# Altium PCB IGrippioV2Pcb.PcbDoc (part 2 of 2)
Units mil, origin at the board's own origin, x right, y up, seen from the top; angles counter-clockwise.
Board outline 2173.3 x 4360 mil, 2 copper layers (Top Layer, Bottom Layer); 134 components, 148 nets, 592 pads, 249 vias.
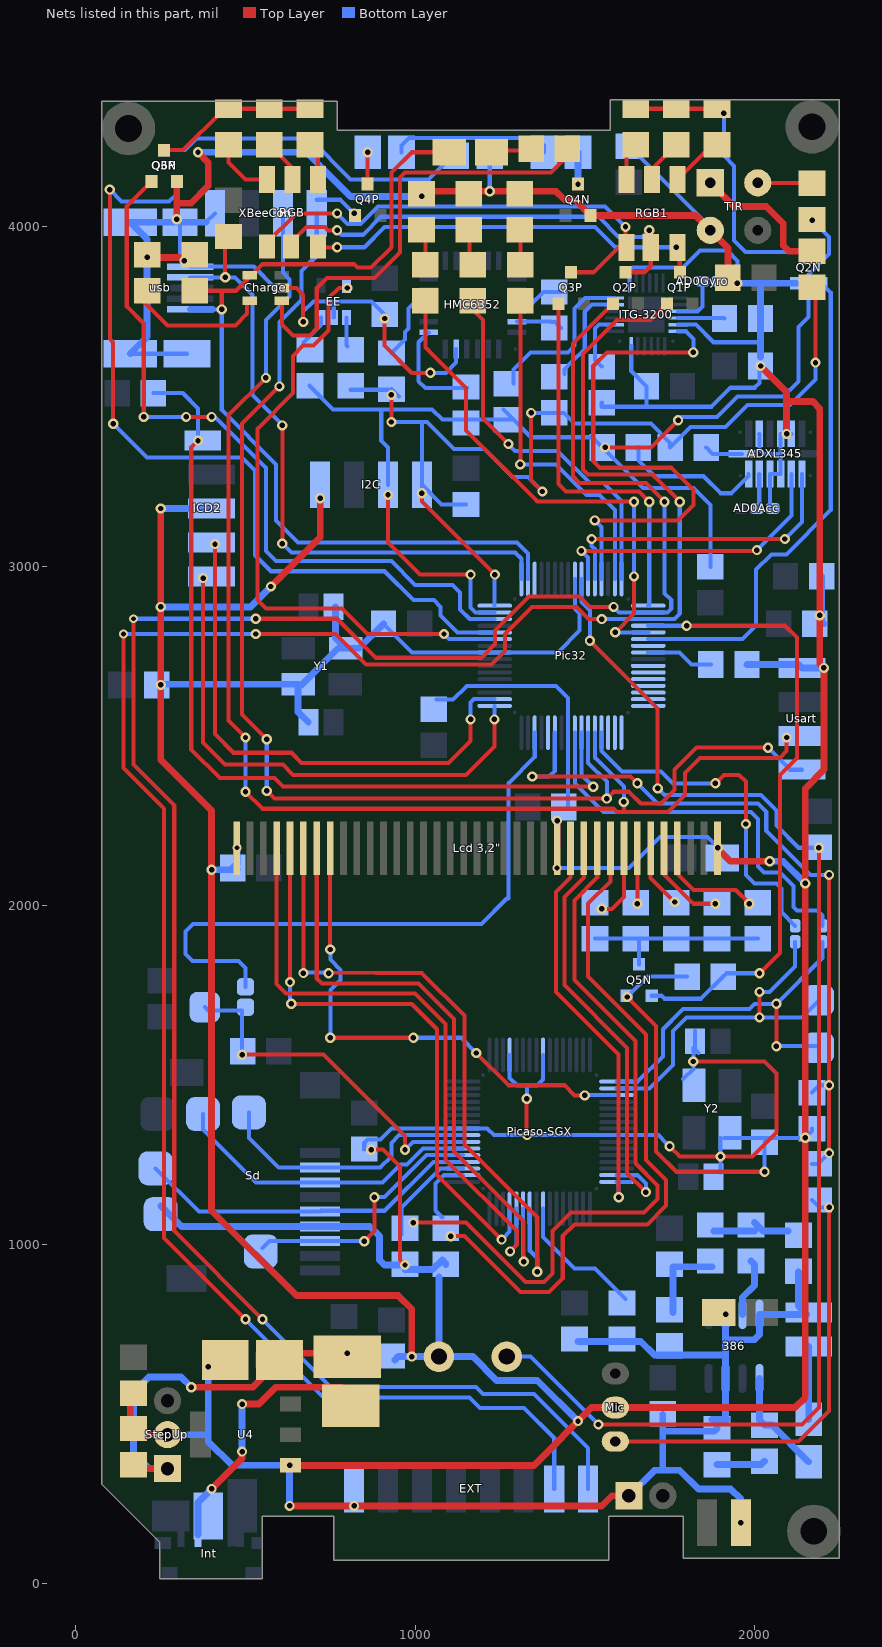
[diagram p2: the nets of this part, all layers, seen from the top]

## Via types
v1: diameter 30, hole 16, Top Layer to Bottom Layer, 239 vias
v2: diameter 26, hole 14, Top Layer to Bottom Layer, 6 vias
v3: diameter 27, hole 14, Top Layer to Bottom Layer, 3 vias
v4: diameter 28, hole 16, Top Layer to Bottom Layer, 1 vias

## Nets (pads, with @x,y where several pads share a name; then routed paths per layer and width w, separated by ;. In a path a pad name is that pad's centre, name@x,y a point inside that pad or via, vN(x,y) a via of type N, cw(c..) or ccw(c..) an arc to the next point about the centre after c; other vN are vias at no path point) (continued)
DGND: 386.2 386.4 386.7 "Lcd 3,2\".1" "Lcd 3,2\".25" "Lcd 3,2\".37" "led 1.2" "led 2.2" "led 3.2" "VIN EXT.1" AD0Acc.3 AD0Gyro.3 ADXL345.2 ADXL345.4 ADXL345.5 ADXL345.10 ADXL345.11 B1.2 B2.2 B3.2 B4.2 B5.2 B6.2 B7.2 B8.2 B9.2 B11.2 B12.2 B13.2 B14.2 BC.2 BU.2 By386.2 ByAcc2.2 ByAcc.2 C1.2 C2.2 C3.1 C4.1 C5.2 C6.2 C7.2 C9.2 C12.2 C13.1 C14.2 C16.2 C17.2 C18.2 Carica.1 Charge.2 EE.2 EXT.1 HMC6352.5 I2C.1 ICD2.3 ITG-3200.1 ITG-3200.11 ITG-3200.18 LS1.2 Mic.2 pad.0@250,1090 Pic32.9 Pic32.20 Pic32.25 Pic32.41 Picaso-SGX.9 Picaso-SGX.20 Picaso-SGX.25 Picaso-SGX.41 Q2N.2 Q3N.2 Q4N.2 Q5N.2 R4.2 R7.1 R8.2 R15.2 R16.2 R20.2 R29.2 Sd.6 SOK.2 StepUp.2 TIR.4 U4.1 Usart.4 usb.1 usb.G1 usb.G2 usb.G3 usb.G4 UV.1 Vin.1 XBeeCon.4 Y1.0 Y2.0 | length 30087.9
  Top Layer w12: Charge.2@607.24,3820 650,3820 670,3800 v1(670,3720) ; v1(870,1280) 905,1280 955,1230 955,955 v1(970,940) ; v1(910,3730) 910,3650 990,3570 v1(1045,3570) ; v1(1328.86,1430) 1328.86,1323.98 v1(1330,1322.83) ; v1@1630,1730 v1(1625,1730) 1710,1645 1710,1275 1770,1215 v1(2030,1215) ; v1(1750,1290) 1780,1260 v1(1900,1260) 1995,1260 2065,1330 2065,1505 2030,1540 v1(1820,1540)
  Top Layer w20: C6.2@150,440 StepUp.2@270,440 ; C6.2@160,480 C7.2@160,570 ; R29.2@220,3910 BU.2@348.11,3910 ; v1(250,3170) v1(250,2880) v1(250,2650) 250,2430 400,2280 v1(400,2105) 400,1100 650,850 950,850 990,810 v1(990,670) ; v1(297.4,4022.6) 297.4,4070 ; Q3N.2@297.4,4133.74 297.4,4070 ; v1(360,4220) 390,4190 390,4120 340,4070 297.4,4070 ; v1(575,2940) 720,3085 v1(720,3200) ; v1(630,230) v1(820,230) 1550,230 1580,260 Vin.1@1630,260 ; U4.1@632.87,349.45 959.45,349.45 ; 960,350 959.45,349.45 ; 1020,4105 1415,4105 1440,4080 1471.14,4080 Q4N.2@1517.4,4033.74 1826.26,4033.74 TIR.4@1870,3990 1921.89,3938.11 B11.2@1921.89,3850 ; 1418.58,2168.5 v1(1418.58,2250) ; v1(1892.52,2170) 1891.02,2168.5 1929.53,2130 v1(2045,2130) ; v1(2018.11,3590) 2095,3513.11 2095,3485 ; v1(2095,3390) 2095,3485 ; 959.45,349.45 1350,349.45 1520,519.45 1520,520 Mic.2@1590,520 2120,520 2150,550 v1(2150,1315) v1(2150,2065) 2150,2345 2205,2400 v1(2205,2700) 2192.5,2712.5 v1(2192.5,2855) 2192.5,3465 2172.5,3485 2095,3485
  Bottom Layer w12: usb.G3@160,3626.1 usb.G4@327.32,3626.1 ; usb.G2@307.09,4013.9 307.09,3913.07 usb.1@337.17,3882.99 524.25,3882.99 587.24,3820 v4@607.24,3820 ; XBeeCon.4@383.9,4013.9 XBeeCon.4@410,4040 ; v1(670,3720) 670,3750 700,3780 760,3780 ; EE.2@760,3732.76 760,3780 ; B6.2@850,1280 850,1300 860,1310 897.48,1310 930,1342.52 Picaso-SGX.9@1140.94,1342.52 1212.48,1342.52 1232.17,1322.83 v1(1330,1322.83) Picaso-SGX.41@1593.7,1322.83 1717.17,1322.83 v1@1740,1300 ; B5.2@906.89,2830 991.27,2745.62 Pic32.25@1234.4,2745.62 1420.62,2745.62 1485,2810 1485,2860 1470.62,2874.38 Pic32.41@1470.62,2962.15 ; B13.2@910,3741.89 871.89,3780 760,3780 ; v1(1045,3570) 1090.71,3570 1120.71,3600 HMC6352.5@1120.71,3640 ; B8.2@1063.45,2606.56 1111.56,2606.56 1152.19,2647.19 Pic32.20@1234.4,2647.19 1414.71,2647.19 1450.93,2610.97 Pic32.9@1450.93,2509.4 B4.2@1450.93,2284.07 ; v1@1220,4100 UV.1@1220,4210 UV.1@1220,4220 ; Picaso-SGX.20@1278.74,1559.06 1278.74,1491.26 1300,1470 1330,1470 ; v1@1330,1430 1330,1470 ; Picaso-SGX.25@1377.17,1559.06 1377.17,1487.17 1360,1470 1330,1470 ; v3(1418,2110) 1630,2110 1721.26,2201.26 1861.26,2201.26 v1(1892.52,2170) ; C18.2@1550,3481.89 1550,3470 1681.89,3470 ; Q5N.2@1622.6,1733.74 Q5N.2@1623.74,1733.74 ; v1(1625,1730) 1685,1790 R8.2@1801.89,1790 ; R20.2@1630,4238.11 1870,3998.11 TIR.4@1870,3990 ; ITG-3200.1@1632.05,3834.76 1632.05,3872.05 1640,3880 1790,3880 1840,3930 1920,3930 1950,3900 v1(1950,3833.74) ; ITG-3200.18@1636.97,3648.58 1636.97,3574.92 B12.2@1681.89,3530 1681.89,3470 ; ITG-3200.11@1774.76,3711.73 1828.27,3711.73 1880,3660 2018.11,3660 ; Y2.0@1789.76,1488.19 1820,1518.43 v1(1820,1540) 1820,1580 C12.2@1835,1565 ; C12.2@1825,1570 C12.2@1825,1630 ; C13.1@1900,1212.13 v1(1900,1260) Y2.0@1900,1314.96 ; Y2.0@1912.13,1314.96 2019.96,1314.96 2020,1315 v1(2150,1315) 2170,1335 C16.2@2170,1341.89 ; ADXL345.2@2014.33,3390 2015.52,3388.81 2015.52,3344.48 2030,3330 2077.32,3330 ; v1(2018.11,3590) 2015,3586.89 2015,3540 2000.94,3525.94 1954.06,3525.94 1930,3525.94 1874.06,3470 1681.89,3470 ; v1(2030,1215) B7.2@2030,1301.89 ; AD0Acc.3@2053.5,3170 2045.83,3177.68 ADXL345.11@2045.83,3271.89 ADXL345.10@2077.32,3271.89 2077.32,3330 ; ADXL345.5@2108.82,3390 ADXL345.4@2077.32,3390 2077.32,3330
  Bottom Layer w20: usb.G3@160,3626.1 210,3676.1 210,3963.9 usb.G1@160,4013.9 usb.G2@307.09,4013.9 XBeeCon.4@383.9,4013.9 ; pad.0@250,1115 311.14,1053.86 Sd.6@720,1053.86 866.14,1053.86 895,1025 895,955 910,940 v1(970,940) ; BC.2@250,2651.81 Y1.0@655,2651.81 Y1.0@655,2650 ; v1(250,2880) 515,2880 v1(575,2940) ; v1(250,3170) ICD2.3@400,3170 ; StepUp.2@270,440 390,440 ; v1(360,4220) 680,4220 810,4090 v1(1020,4090) ; v1(390,640) 390,420 460,350 v1(630,350) v1(630,230) ; v1(400,2105) B9.2@475,2105 ; B9.2@461.89,2110 475,2123.11 v3(475,2170) ; C3.1@685,2540 655,2570 Y1.0@655,2650 ; C4.1@765,2880 765,2788.11 Y1.0@795,2758.11 ; B5.2@906.89,2830 835,2758.11 Y1.0@795,2758.11 ; R7.1@940,660 950,670 v1(990,670) SOK.2@1070,670 ; R16.2@970,926.42 1051.42,926.42 1080,955 1090,945 R15.2@1090,941.89 ; R15.2@1070,905 SOK.2@1070,670 ; SOK.2@1090,690 SOK.2@1070,670 ; v1(1480,480) 1360,600 1240,600 1170,670 SOK.2@1070,670 ; B1.2@1480,715 1665,715 1705,675 1915,675 ; Mic.2@1590,520 B3.2@1710,520 ; Vin.1@1630,260 1705,335 1730,335 ; B3.2@1730,500 1730,450 ; R4.2@1875,485 1920,485 1915,490 386.7@1915,605.51 ; R4.2@1890,458.11 1881.89,450 1730,450 ; AD0Gyro.3@1893.7,3840 1899.96,3833.74 v1(1950,3833.74) 2018.11,3833.74 ; 386.7@1915,645 386.7@1915,605.51 ; v1(1915,794.49) 1915,720 ; v1(1960,180) 1960,250 1930,280 1835,280 1780,335 1730,335 ; C9.2@1978.11,2710 2130,2710 Usart.4@2140,2700 v1(2205,2700) ; B2.2@2018.11,3616.89 2018.11,3660 C17.2@2018.11,3730 2018.11,3833.74 ; v1(2045,2130) 2085,2130 v1(2150,2065) ; Q2N.2@2122.6,3833.74 2018.11,3833.74 ; C5.2@2130,920 2130,818.98 2154.49,794.49 386.4@2015,794.49 2015,735 2000,720 1915,720 ; ByAcc2.2@2198.11,2970 2198.11,2836.89 ByAcc.2@2205,2830 ; Y1.0@655,2650 665,2650 773.11,2758.11 Y1.0@795,2758.11 ; 1730,335 1730,450 ; 386.7@1915,605.51 1915,675 ; 1915,675 1915,720
  other v1: 320,3900 210,3910 1220,4105
  other v4: 600,3820
I2CCLOCK: I2C.4 Pic32.32 R6.2 R35.2 S2.1 S3.1 S6.2 S7.1 | length 3028.2
  Top Layer w12: v1(930,3425) v1(930,3505) ; v1(1020,3215) 1020,3190 v1(1235,2975) ; v1(1341.81,3451.81) 1341.81,3253.19 v1(1375,3220) ; R35.2@2170,3821.89 2180,3811.89 v1(2180,3600)
  Bottom Layer w12: S7.1@809.92,3520 S6.2@920,3520 ; v1(930,3425) 1020,3425 ; S6.2@930,3521.89 S6.2@951.89,3500 ; v1(1020,3215) I2C.4@1020,3240 ; R6.2@1150,3181.89 1078.11,3181.89 I2C.4@1020,3240 ; Pic32.32@1234.4,2883.41 v1@1234.4,2975 ; v1(1341.81,3451.81) S2.1@1410,3451.81 1438.19,3451.81 1470,3420 1695,3420 1751.81,3363.19 S3.1@1751.81,3350 1811.81,3410 1915,3410 1980,3475 2105,3475 2180,3550 v1(2180,3600) ; v1(1375,3220) 1332.5,3262.5 1287.5,3262.5 1205,3345 1115,3345 1035,3425 1020,3425 ; I2C.4@1020,3240 1020,3425
I2CDATA: I2C.3 Pic32.31 R5.2 R18.2 S1.1 S4.1 S5.2 S8.1 | length 3562.8
  Top Layer w12: v1(920,3210) 920,3070 1015,2975 v1(1163.45,2975) ; v1(1560,3350) 1695,3350 v1(1775,3430)
  Bottom Layer w12: S8.1@688.19,3531.81 758.11,3461.89 900,3461.89 ; I2C.3@920,3240 920,3350 900,3370 900,3461.89 ; v1(1163.45,2975) 1163.45,2878.45 1178.18,2863.73 Pic32.31@1234.4,2863.73 ; S1.1@1259.92,3461.89 S1.1@1290,3431.81 ; v1(1775,3430) 1785,3440 1888.81,3440 1889.4,3439.4 1950,3500 2085,3500 2130,3545 2130,3705 2159.72,3734.72 2159.72,3859.72 2220,3920 2220,3970 v1(2170,4020) ; R5.2@1870,2998.11 1870,3180 1820,3230 1671.81,3230 S4.1@1551.81,3350 1521.81,3380 1341.81,3380 S1.1@1290,3431.81 ; 900,3461.89 1050,3461.89 1080.08,3431.81 S1.1@1270,3431.81 S1.1@1290,3431.81
INTACC1: ADXL345.8 Pic32.44 | length 909.6
  Top Layer w12: v1(1520,3080) v1(2090,3080)
  Bottom Layer w12: v1(1520,3080) 1520,3060 1529.67,3050.33 Pic32.44@1529.67,2962.15 ; v1@2095,3080 v1(2090,3080) 2140.31,3130.32 ADXL345.8@2140.31,3271.89
INTACC2: ADXL345.9 Pic32.43 | length 882.1
  Top Layer w12: v1(1490,3045) v1@2007.5,3045
  Bottom Layer w12: v1@1485,3050 v1(1490,3045) 1509.99,3025.01 Pic32.43@1509.99,2962.15 ; v1(2007.5,3047.5) 2055,3095 2108.82,3148.82 ADXL345.9@2108.82,3271.89
INTGYRO: ITG-3200.12 Pic32.45 | length 1555.9
  Top Layer w12: v1(1529.36,3135) 1775,3135 1820,3180 1820,3225 1755,3290 1545,3290 1525,3310 1525,3590 1565,3630 v1(1820,3630)
  Bottom Layer w12: v1@1525,3135 v1(1529.36,3135) 1549.36,3115 Pic32.45@1549.36,2962.15 ; ITG-3200.12@1774.76,3692.05 1797.95,3692.05 1820,3670 v1(1820,3630)
K1: "Lcd 3,2\".30" R90.1 | length 301.3
  Top Layer w12: v1(1550,1990) 1580,1990 1615.43,2025.43 1615.43,2168.5 1615.43,2090.43
K2: "Lcd 3,2\".31" R91.1 | length 163.6
  Top Layer w12: 1654.8,2168.5 1654.8,2005.2 v1(1655,2005)
K3: "Lcd 3,2\".32" R92.1 | length 187.8
  Top Layer w12: 1694.17,2168.5 1694.17,2080.83 v1(1765,2010)
K4: "Lcd 3,2\".33" R93.1 | length 264.3
  Top Layer w12: 1733.54,2168.5 1733.54,2091.46 1815.84,2009.16 1820,2005 v1(1885,2005)
K5: "Lcd 3,2\".34" R94.1 | length 324.6
  Top Layer w12: 1772.91,2168.5 1772.91,2092.09 1820,2045 1945,2045 v1(1985,2005)
LCDCS: "Lcd 3,2\".4" Picaso-SGX.60 | length 1846.7
  Top Layer w12: 591.81,2168.5 591.81,1768.19 620,1740 1000,1740 1090,1650 1090,1250 1300,1040 1300,1000 v1(1280,980)
  Bottom Layer w12: v1(1280,980) 1298.43,998.43 Picaso-SGX.60@1298.43,1106.3
LCDRX: LcdRX.1 Pic32.8 | length 1189.2
  Bottom Layer w12: Pic32.8@1470.62,2509.4 1470.62,2359.38 1555,2275 1990,2275 2010,2255 2010,2115 2027.76,2097.24 2075,2097.24 2115,2057.24 2115,1995 2125,1985 2185,1985 2200,1970 LcdRX.1@2200,1940
LCDRX1: LcdRX.2 Picaso-SGX.33 Rx.1 | length 1094
  Top Layer w12: v1@2065,1595 v1(2065,1710)
  Bottom Layer w12: Picaso-SGX.33@1593.7,1480.31 1655.31,1480.31 1730,1555 1730,1635 1785,1690 1790,1695 1985,1695 2000,1710 v1(2065,1710) 2200,1845 LcdRX.2@2200,1892.76 ; v1(2065,1585) 2185,1585 Rx.1@2190,1580
LCDTX: LcdTX.1 Pic32.4 | length 1070.8
  Top Layer w12: v1@1875,2360 v1(1885,2360) 1910,2385 1955,2385 1975,2365 v1(1975,2240)
  Bottom Layer w12: Pic32.4@1549.36,2509.4 1549.36,2455.64 1610,2395 1725,2395 1760,2360 v1(1885,2360) ; v1(1975,2240) 1975,2090 2000,2065 2065,2065 2080,2050 2080,1980 LcdTX.1@2120,1940
LCDTX1: LcdTX.2 Picaso-SGX.34 Tx.1 | length 1046.1
  Top Layer w12: v1(2015,1670) v1(2015,1745)
  Bottom Layer w12: Picaso-SGX.34@1593.7,1460.63 1690.63,1460.63 1760,1530 1760,1630 1800,1670 v1(2015,1670) 2140,1670 Tx.1@2190,1720 ; v1(2015,1745) 2045,1745 2120,1820 LcdTX.2@2120,1892.76
LED1: Pic32.48 R11.2 | length 1098
  Top Layer w12: R11.2@1170,3781.89 1170,3755 1200,3725 1200,3435 v1(1275,3360)
  Bottom Layer w12: v1(1275,3360) 1295,3340 1420,3340 1515,3245 1555,3245 1608.41,3191.59 Pic32.48@1608.41,2962.15
LED2: Pic32.47 R9.2 | length 1019.4
  Top Layer w12: v1(1310,3300) R9.2@1310,3781.89
  Bottom Layer w12: v1(1310,3300) 1415,3300 1505,3210 1543.73,3210 1588.73,3165 Pic32.47@1588.73,2962.15
LED3: Pic32.53 R10.2 | length 1508.7
  Top Layer w12: R10.2@1030,3781.89 1030,3645 1150,3525 1150,3400 1360,3190 v1(1645,3190) ; v1(1590,2805) 1645,2860 v1(1645,2970)
  Bottom Layer w12: v1@1600,2805 1600.33,2804.67 Pic32.53@1687.15,2804.67 ; v1(1645,2970) v1(1645,3190)
LEDLCD: Pic32.52 Q5N.1 R8.1 | length 1851.5
  Top Layer w12: v1(1800,2824.36) 2090.64,2824.36 2125,2790 2125,2435 2075,2385 2075,1860 v1(2015,1800)
  Bottom Layer w12: Pic32.52@1687.15,2824.36 v1(1800,2824.36) ; Q5N.1@1697.4,1733.74 1726.26,1733.74 1735,1725 1843.19,1725 R8.1@1908.19,1790 ; R8.1@1900,1781.81 R8.1@1908.19,1790 ; v1(2015,1800) 1918.19,1800 R8.1@1908.19,1790
LEDUV: Pic32.28 Q6P.1 | length 2499.1
  Top Layer w12: v1(100,4110) 100,3670 110,3660 v1(110,3420)
  Bottom Layer w12: v1(100,4110) 135,4075 275,4075 297.4,4097.4 Q6P.1@297.4,4133.74 ; v1(110,3420) 210,3320 ; 205,3325 210,3320 ; Pic32.28@1234.4,2804.67 1125.33,2804.67 1075,2855 1075,2880 1055,2900 995,2900 910,2985 575,2985 527.82,3032.18 527.82,3282.18 490,3320 210,3320
MIC: C16.1 Pic32.11 R28.2 | length 2155.8
  Top Layer w12: v1(1345,2380) 1635,2380 v1(1655,2360) ; v1(2220,1270) v1(2220,1470) v1(2220,2090)
  Bottom Layer w12: v1(1345,2380) 1395,2380 1411.56,2396.56 1411.56,2435 Pic32.11@1411.56,2509.4 ; v1(1655,2360) 1715,2300 2010,2300 2035,2275 2035,2220 2165,2090 v1(2220,2090) ; R28.2@2170,1238.11 2188.11,1238.11 v1(2220,1270) ; C16.1@2170,1448.19 2191.81,1470 v1(2220,1470)
MRCL: ICD2.1 Pic32.7 R27.1 | length 2568.1
  Top Layer w12: v1(360,3370) 340,3350 340,2910 340,2460 425,2375 585,2375 610,2350 v1(1525,2350)
  Bottom Layer w12: R27.1@228.19,3510 315,3510 360,3465 v1(360,3370) ; Pic32.7@1490.3,2509.4 1490.3,2384.7 v1(1525,2350)
Net386_3: 386.3 C8.1 | length 176
  Bottom Layer w20: 386.3@1965,794.49 1965,845 2000,880 2000,941.81 C8.1@1990,951.81
Net386_5: 386.5 C10.1 C11.1 | length 318.3
  Bottom Layer w20: 386.5@2015,605.51 2015,483.19 C10.1@2030,468.19 2051.81,468.19 C11.1@2160,360
NetAD0Acc_2: AD0Acc.2 ADXL345.12 | length 104.8
  Bottom Layer w12: AD0Acc.2@2007.24,3170 2014.33,3177.09 ADXL345.12@2014.33,3271.89
NetAD0Gyro_2: AD0Gyro.2 ITG-3200.9 | length 160
  Bottom Layer w12: ITG-3200.9@1774.76,3751.1 1832.51,3751.1 1847.24,3765.83 1847.24,3810 ; 1847.24,3802.76 1847.24,3810 ; AD0Gyro.2@1847.24,3840 1847.24,3810
NetADXL345_13: ADXL345.13 S4.2 | length 434.6
  Bottom Layer w12: S4.2@1655,3346.89 S4.2@1658.11,3350 1658.11,3311.89 1705,3265 1850,3265 1900,3215 1932.16,3215 1982.83,3265.67 ADXL345.13@1982.83,3271.89
NetADXL345_14: ADXL345.14 S3.2 | length 144.3
  Bottom Layer w12: S3.2@1858.11,3350 1877.17,3330.94 ADXL345.14@1963.15,3330.94 ADXL345.14@1931.81,3330.94
NetC2_1: C2.1 R2.2 R3.1 | length 250
  Bottom Layer w20: C2.1@1760,800 1760,935 R3.1@1875,935
NetC5_1: C5.1 C8.2 R3.2 | length 230.4
  Bottom Layer w20: R3.2@1880,1040 C8.2@2000,1040 ; C8.2@2000,1065 2025,1040 C5.1@2100,1040
NetC9_1: C9.1 Pic32.56 | length 199.4
  Bottom Layer w12: Pic32.56@1687.15,2745.62 1779.38,2745.62 1815,2710 C9.1@1871.81,2710
NetC10_2: C10.2 R4.1 | length 144.2
  Bottom Layer w20: R4.1@1890,351.81 2019.92,351.81 C10.2@2030,361.89
NetC11_2: C11.2 LS1.1 | length 215
  Bottom Layer w20: C11.2@2160,485 LS1.1@2160,700
NetC14_1: C14.1 Picaso-SGX.56 | length 402
  Bottom Layer w12: Picaso-SGX.56@1377.17,1106.3 1377.17,1022.83 1470,930 1530,930 C14.1@1620,840
NetC17_1: C17.1 ITG-3200.10 | length 137.6
  Bottom Layer w12: ITG-3200.10@1774.76,3731.42 1910.39,3731.42 C17.1@1911.81,3730
NetC18_1: C18.1 ITG-3200.20 | length 182.7
  Bottom Layer w12: C18.1@1550,3588.19 1530,3608.19 1530,3700 1541.73,3711.73 ITG-3200.20@1587.76,3711.73
NetCharge_1: Charge.1 R31.1 | length 1364.1
  Top Layer w12: Charge.1@607.24,3782.6 607.24,3712.76 640,3680 690,3680 710,3700 710,3820 740,3850 880,3850 955,3925 955,4145 970,4160 1400,4160 1448.19,4208.19 R31.1@1448.19,4230
NetCharge_5: Charge.5 R29.1 | length 389.8
  Top Layer w12: R29.1@189.09,3790.91 270,3710 470,3710 504.1,3744.1 Charge.5@504.1,3771.26
NetEE_1: EE.1 S7.2 | length 86.6
  Bottom Layer w12: EE.1@797.4,3732.76 797.4,3649.84 S7.2@800,3647.24
NetEE_3: EE.3 S8.2 | length 95.1
  Bottom Layer w12: S8.2@670.94,3659.06 722.6,3710.71 EE.3@722.6,3732.76
NetHMC6352_7: HMC6352.7 S5.1 | length 318.6
  Bottom Layer w12: HMC6352.7@1029.21,3689.21 HMC6352.7@1039.21,3689.21 ; HMC6352.7@1040,3689.21 HMC6352.7@1039.21,3689.21 ; S5.1@1153.19,3525 1030,3525 1010,3545 1010,3660 HMC6352.7@1039.21,3689.21
NetHMC6352_10: HMC6352.10 S6.1 | length 222.3
  Bottom Layer w12: S6.1@930,3628.19 970,3668.19 970,3690 980,3700 980,3760 1003.7,3783.7 HMC6352.10@1040,3783.7
NetHMC6352_22: HMC6352.22 R1.1 | length 153.3
  Bottom Layer w12: HMC6352.22@1300,3752.2 1322.32,3752.2 1340.56,3770.44 1340.56,3770.56 1378.19,3808.19 R1.1@1430,3808.19
NetHMC6352_23: HMC6352.23 R1.2 | length 137.8
  Bottom Layer w12: HMC6352.23@1300,3720.71 1399.29,3720.71 1400,3720 1411.89,3720 R1.2@1430,3701.89
NetIR1_1: IR1.1 IR2.2 | length 478.4
  Bottom Layer w12: IR1.1@960,4220 960,4240 982.21,4262.21 1357.79,4262.21 1380,4240 IR2.2@1380,4220
NetIR1_2: IR1.2 Q4P.3 | length 93.7
  Top Layer w12: Q4P.3@860,4126.26 v1(860,4220)
NetIR2_1: IR2.1 Q4N.3 | length 93.7
  Bottom Layer w20: v1(1480,4126.26) IR2.1@1480,4220
NetITG-3200_23: ITG-3200.23 S2.2 | length 304
  Bottom Layer w12: S2.2@1440,3567.24 1440,3580 1460,3600 1500,3640 1500,3750 1520.79,3770.79 ITG-3200.23@1587.76,3770.79
NetITG-3200_24: ITG-3200.24 S1.2 | length 491.3
  Bottom Layer w12: S1.2@1290,3538.11 1290,3580 1340,3630 1450,3630 1470,3650 1470,3760 1500.47,3790.47 ITG-3200.24@1587.76,3790.47
"Netled 1_1": "led 1.1" R11.1 | length 116
  Top Layer w12: R11.1@1160,3868.19 1160,3970 ; 1160,3980 1170,3970
"Netled 2_1": "led 2.1" R9.1 | length 116
  Top Layer w12: R9.1@1300,3878.19 R9.1@1310,3868.19 ; R9.1@1310,3878.19 1310,3980
"Netled 3_1": "led 3.1" R10.1 | length 116
  Top Layer w12: 1020,3980 1030,3970 R10.1@1030,3868.19
NetledC_2: ledC.2 R31.2 | length 121
  Top Layer w12: ledC.2@1223.11,4225 R31.2@1330,4225 ; R31.2@1331.89,4240 R31.2@1341.89,4230
NetMic_3: Mic.3 R28.1 | length 1326.3
  Top Layer w12: Mic.3@1590,420 2130,420 2220,510 v1(2220,1110)
  Bottom Layer w12: R28.1@2170,1131.81 2191.81,1110 v1(2220,1110)
NetQ1P_3: Q1P.3 RGB1.6 RGB.6 | length 1181.4
  Top Layer w12: RGB.6@713.23,3939.21 v1@769.21,3939.21 ; RGB1.6@1773.23,3939.21 1780,3932.44 Q1P.3@1780,3866.26
  Bottom Layer w12: v1(770,3940) 850,3940 910,4000 1530,4000 1590,3940 v1(1770,3940)
NetQ2N_3: Q2N.3 R24.1 R26.1 R30.1 | length 886.4
  Top Layer w12: R26.1@1650,4348.19 R30.1@1770,4348.19 R24.1@1890,4348.19 ; R24.1@1896.81,4348.19 R24.1@1921.81,4348.19
  Bottom Layer w12: v1(1910,4335) 1910,4210 1940,4180 1940,3960 1973.74,3926.26 Q2N.3@2160,3926.26
NetQ2P_3: Q2P.3 RGB1.5 RGB.5 | length 1343.8
  Top Layer w12: RGB.5@634.49,3939.21 634.49,3954.49 680,4000 733.82,4000 743.82,3990 v1(770,3990) ; Q2P.3@1620,3866.26 1676.26,3866.26 1694.49,3884.49 RGB1.5@1694.49,3939.21 1690,3943.7 v1(1690,3990)
  Bottom Layer w12: v1(770,3990) 783.21,3976.79 846.79,3976.79 900,4030 1540,4030 1600,3970 1670,3970 v1(1690,3990)
NetQ3N_3: Q3N.3 R21.1 R22.1 R23.1 | length 510.5
  Top Layer w12: Q3N.3@260,4226.26 316.26,4226.26 430,4340 471.81,4340 R23.1@480,4348.19 ; R23.1@450,4348.19 R23.1@480,4348.19 ; R21.1@690,4348.19 R22.1@570,4348.19 R23.1@480,4348.19
NetQ3P_3: Q3P.3 RGB1.4 RGB.4 | length 1421.5
  Top Layer w12: RGB.4@563.62,3939.21 563.62,3953.62 650,4040 v1(770,4040) ; Q3P.3@1460,3866.26 1526.26,3866.26 1530,3870 1599.21,3939.21 RGB1.4@1623.62,3939.21 1620,3942.83 v1(1620,4000)
  Bottom Layer w12: v1(770,4040) 800.99,4009.01 839.01,4009.01 890,4060 1560,4060 v1(1620,4000)
NetQ5N_3: Q5N.3 R90.2 R91.2 R92.2 R93.2 R94.2 | length 555.6
  Bottom Layer w12: R90.2@1530,1901.89 R91.2@1650,1901.89 R92.2@1770,1901.89 R93.2@1890,1901.89 R94.2@2010,1901.89 ; Q5N.3@1660,1826.26 R91.2@1660,1901.89
NetQ6P_3: Q6P.3 UV.2 | length 956.8
  Bottom Layer w12: Q6P.3@260,4226.26 321.26,4226.26 355,4260 690,4260 810,4140 1040,4140 UV.2@1120,4220
NetR18_1: R18.1 TIR.2 | length 160
  Top Layer w12: TIR.2@2010,4130 R18.1@2170,4130
NetR21_2: R21.2 RGB.3 | length 111.5
  Top Layer w12: R21.2@690,4241.89 713.23,4218.66 RGB.3@713.23,4140
NetR22_2: R22.2 RGB.2 | length 130.2
  Top Layer w12: R22.2@570,4241.89 638.43,4173.46 RGB.2@638.43,4140
NetR23_2: R23.2 RGB.1 | length 186.2
  Top Layer w12: R23.2@450,4241.89 450,4190 500,4140 RGB.1@563.62,4140
NetR24_2: R24.2 RGB1.3 | length 144.1
  Top Layer w12: RGB1.3@1773.23,4140 R24.2@1875.12,4241.89
NetR26_2: R26.2 RGB1.1 | length 112.8
  Top Layer w12: RGB1.1@1623.62,4140 1623.62,4215.51 R26.2@1650,4241.89
NetR30_2: R30.2 RGB1.2 | length 131.5
  Top Layer w12: RGB1.2@1698.43,4140 1698.43,4170.31 R30.2@1770,4241.89
NetR35_1: R35.1 TIR.1 | length 421.7
  Top Layer w20: TIR.1@1870,4130 1940,4060 2035,4060 2085,4010 2085,3945 2101.81,3928.19 R35.1@2170,3928.19
NIENTE: Pic32.35
OC1: Pic32.49 Q3P.1 | length 1128.2
  Top Layer w12: Q3P.1@1422.6,3773.74 1422.6,3242.4 1445,3220 1660,3220 v1(1690,3190)
  Bottom Layer w12: Pic32.49@1687.15,2883.41 1690,2886.26 v1(1690,3190)
OC3: EXT.8 Pic32.50 Q2P.1 | length 6396.1
  Top Layer w12: v2(170,2845) 170,2415 290,2295 290,1040 v1(550,780) ; v1(530,2845) 770,2845 885,2730 1195,2730 1235,2770 1235,2810 1335,2910 1485,2910 1515,2880 v1(1585,2880) ; Q2P.1@1582.6,3773.74 1465,3656.14 1465,3265 1485,3245 1680,3245 v1(1735,3190)
  Bottom Layer w12: v2(170,2845) v1(530,2845) ; v1(550,780) 750,580 1180,580 1200,560 1350,560 1510,400 EXT.8@1510,280 ; v1(1585,2880) 1601.27,2863.73 Pic32.50@1687.15,2863.73 1743.73,2863.73 1755,2875 1755,2900 1735,2920 v1(1735,3190)
OC4: EXT.7 Pic32.51 Q1P.1 | length 6476.1
  Top Layer w12: v2(140,2800) 140,2405 260,2285 260,1020 v1(500,780) ; v1(530,2800) 765,2800 855,2710 1225,2710 1265,2750 1265,2800 1345,2880 1475,2880 1510.96,2844.04 v1(1550,2844.04) ; Q1P.1@1742.6,3773.74 1693.86,3725 1595,3725 1495,3625 1495,3285 1510,3270 1700,3270 v1(1780,3190)
  Bottom Layer w12: v2(140,2800) v1(530,2800) ; v1(500,780) 730,550 1160,550 1191.07,518.93 1321.07,518.93 1410,430 EXT.7@1410,280 ; v1(1550,2844.04) Pic32.51@1687.15,2844.04 1764.04,2844.04 1780,2860 v1(1780,3190)
OK: Pic32.42 R14.1 SOK.1 | length 3962.6
  Top Layer w12: v1(1515,2780) 1715,2580 1715,2480 v1(1715,2345) ; v1(1540,470) 2140,470 2190,520 v1(2190,2170)
  Bottom Layer w12: SOK.1@1270,670 1340,670 v1(1540,470) ; Pic32.42@1490.3,2962.15 1490.3,2894.7 1515,2870 v1(1515,2780) v1@1515,2775 ; v1(1715,2345) 1735,2325 2020,2325 2065,2280 2065,2235 2130,2170 v1(2190,2170)
P2: Pic32.55
P3: Pic32.62
P4: Pic32.63
P5: Pic32.64
P6: Pic32.1
P7: Pic32.2
P8: Pic32.3
P23: Pic32.58
P29: Pic32.60
P32: Pic32.61
P50: Pic32.59
PWMTEMP: Pic32.12
RB6: ICD2.5 Pic32.17 | length 1536.1
  Top Layer w12: v1(375,2965) 375,2480 440,2415 610,2415 640,2385 1150,2385 1233.45,2468.45 v1(1233.45,2548.45)
  Bottom Layer w12: v1@1234.4,2549.4 Pic32.17@1234.4,2588.14
RB7: ICD2.4 Pic32.18 | length 1563.9
  Top Layer w12: v1(410,3065) 410,2505 465,2450 635,2450 665,2420 1098.45,2420 1163.45,2485 v1(1163.45,2548.45)
  Bottom Layer w12: v1(1163.45,2548.45) 1163.45,2598.45 1172.82,2607.82 Pic32.18@1234.4,2607.82
READ: "Lcd 3,2\".7" Picaso-SGX.59 | length 1794.5
  Top Layer w12: 709.92,2168.5 710,2168.43 710,1785 725,1770 1010,1770 1115,1665 1115,1275 1320,1070 v1(1320,950)
  Bottom Layer w12: v1@1318.11,950 Picaso-SGX.59@1318.11,1106.3
RES: LcdRES.1 Pic32.14 | length 1829.1
  Bottom Layer w12: LcdRES.1@500,1760 500,1815 479.12,1835.88 344.12,1835.88 322.87,1857.13 322.87,1922.87 345,1945 1195,1945 1270,2020 1275,2020 1275,2360 ; 1275.03,2360.03 1352.51,2437.51 Pic32.14@1352.51,2509.4
RES1: LcdRES.2 Picaso-SGX.7 R17.1 Res.1 | length 1044.2
  Top Layer w12: v1(490,1560) 730,1560 970,1320 v1(970,1280)
  Bottom Layer w12: Res.1@380,1700 389.84,1690.16 490,1690.16 v1(490,1560) ; v1(970,1280) 993.15,1303.15 Picaso-SGX.7@1140.94,1303.15
RGB1: Pic32.30 Q3N.1 | length 2198.6
  Top Layer w12: v1(200,3440) 200,3715 150,3765 150,4061.14 Q3N.1@222.6,4133.74 ; v1(325,3440) v1(400,3440)
  Bottom Layer w12: v1(200,3440) v1(325,3440) ; v1(400,3440) 410,3440 560,3290 560,3045 590,3015 930,3015 1000,2945 1110,2945 1132.5,2922.5 1132.5,2872.5 1160.96,2844.04 Pic32.30@1234.4,2844.04
RGB2: Pic32.54 Q2N.1 | length 1472.1
  Bottom Layer w12: Pic32.54@1687.15,2784.99 1794.99,2784.99 1965,2784.99 2005,2824.99 2005,2990 2050,3035 2095,3035 2225,3165 2225,3806.14 Q2N.1@2197.4,3833.74
RS: "Lcd 3,2\".5" Picaso-SGX.61 | length 1719.3
  Top Layer w12: 631.18,2168.5 v1(631.18,1773.82) v1@635,1770 ; v1(635,1710) 990,1710 1065,1635 1065,1205 v1(1255,1015)
  Bottom Layer w12: v1(631.18,1773.82) 631.18,1713.82 v1(635,1710) ; v1@1260,1020 1278.74,1038.74 Picaso-SGX.61@1278.74,1106.3
RST: "Lcd 3,2\".8" Picaso-SGX.35 | length 1497.2
  Top Layer w12: v1@749.29,1870.71 749.29,2168.5 ; v1(750,1610) v1(995,1610) ; v1(1180,1565) 1275,1470 1440,1470 1470,1440 v1(1500,1440)
  Bottom Layer w12: v1(750,1610) 750,1750 780,1780 780,1810 750,1840 v1(750,1870) ; v1(995,1610) 1135,1610 v1(1180,1565) ; v1(1500,1440) 1500.94,1440.94 Picaso-SGX.35@1593.7,1440.94
RX-BEE: Pic32.5 Usart.2 XBeeCon.2 | length 3880.8
  Top Layer w12: v1(500,2335) 550,2285 1585,2285 1595,2275 1615,2275 ; v1(500,2495) 450,2545 450,3445 v1(560,3555) ; v1(1615,2305) 1615,2275 ; v1(2095,2495) 2095,2455 2075,2435 1840,2435 1795,2390 1795,2325 1745,2275 1615,2275
  Bottom Layer w12: v1(500,2335) v1(500,2495) ; v1(560,3555) 560,3725 630,3795 630,3845 610,3865 XBeeCon.2@610,4040 XBeeCon.2@610,4000 ; Pic32.5@1529.67,2509.4 1529.67,2435.33 1615,2350 v1@1615,2315
SDCS: pad.0@510,1390 Picaso-SGX.8 Sd.2 | length 810.5
  Bottom Layer w12: 510,1320 510,1315 ; pad.0@510,1390 510,1315 ; Picaso-SGX.8@1140.94,1322.83 952.83,1322.83 930,1300 930,1260 897.09,1227.09 Sd.2@720,1227.09 597.91,1227.09 510,1315
SDSCK: pad.0@235,1225 Picaso-SGX.4 Sd.5 | length 1019.8
  Bottom Layer w12: pad.0@235,1225 362.83,1097.17 Sd.5@720,1097.17 722.83,1100 910,1100 1054.09,1244.09 Picaso-SGX.4@1140.94,1244.09
SDSDI: pad.0@545,980 Picaso-SGX.5 Sd.7 | length 763.2
  Top Layer w12: v1(850,1010) 880,1040 v1(880,1140)
  Bottom Layer w12: pad.0@550,990 570.55,1010.55 Sd.7@720,1010.55 v1@850,1010.55 ; v1(880,1140) 910,1140 1033.78,1263.78 Picaso-SGX.5@1140.94,1263.78
SDSDO: pad.0@375,1385 Picaso-SGX.6 Sd.3 | length 916.9
  Bottom Layer w12: pad.0@375,1385 375,1340 531.22,1183.78 Sd.3@720,1183.78 903.78,1183.78 956.59,1236.59 976.59,1236.59 1023.46,1283.46 Picaso-SGX.6@1140.94,1283.46
TX-BEE: Pic32.6 Q4P.1 Usart.1 XBeeCon.1 | length 3903.9
  Top Layer w12: v1(562.5,2337.5) 585,2315 v1(1565,2315) 1585,2335 1630,2335 1665,2300 1725,2300 1765,2340 1765,2400 1830,2465 v1(2040,2465) ; v1(562.5,2490) 490,2562.5 490,3420 v1@597.5,3527.5
  Bottom Layer w12: v1(562.5,2337.5) v1(562.5,2490) ; v1(600,3530) 600,3720 665,3785 665,3870 710,3915 XBeeCon.1@710,4040 ; XBeeCon.1@710,4080 780,4080 v1(820,4040) ; Pic32.6@1509.99,2509.4 1509.99,2420.01 1565,2365 v1(1565,2315) ; v1(2040,2465) 2105,2400 Usart.1@2140,2400
USBID: Pic32.33 R13.1 usb.2 | length 1881.2
  Top Layer w12: v1(440,3851.5) 440,3961.81 R13.1@450,3971.81 ; v1(608.52,3066.48) v1(608.52,3415)
  Bottom Layer w12: usb.2@337.17,3851.5 v1(440,3851.5) 468.5,3851.5 520,3800 520,3505 v1@609.26,3415.74 ; v1(608.52,3066.48) 635,3040 1295,3040 1313.14,3021.86 Pic32.33@1313.14,2962.15
VBUS: BU.1 Charge.4 ledC.1 Pic32.34 usb.5 | length 2816.3
  Top Layer w12: BU.1@350,3811.81 430,3811.81 ; v1(430,3757.01) 430,3811.81 ; ledC.1@1100,4220 990,4220 930,4160 930,3940 870,3880 830,3880 820,3890 550,3890 471.81,3811.81 430,3811.81
  Bottom Layer w12: usb.5@337.17,3757.01 v1(430,3757.01) 430,3460 590,3300 590,3135 655,3070 1300,3070 1332.82,3037.18 Pic32.34@1332.82,2962.15
  Bottom Layer w20: usb.5@337.17,3757.01 usb.5@402.99,3757.01
VIN: D3.1 Int.2 pad.1@390,200 | length 775.8
  Top Layer w20: v1(400,280) 490,370 v1(490,390) ; v1(490,530) 540,530 582.5,572.5 590,580 785,580 D3.1@800,565
  Bottom Layer w20: Int.2@360,145 360,240 v1(400,280) ; v1(490,390) v1(490,530)
VIN2: C1.1 C6.1 D3.2 R25.2 StepUp.1 | length 1219.9
  Top Layer w20: C6.1@160,355 175,340 StepUp.1@270,340 ; v1@343.94,583.94 v1(340,580) 521.99,580 600,658.01 C1.1@600,660 ; C1.1@540,640 540,680 790,680 D3.2@800,690
  Bottom Layer w20: StepUp.1@270,340 215,340 170,385 170,565 215,610 310,610 v1(340,580)
  other v1: 800,680
WP: EE.5 Pic32.27 | length 1823.7
  Top Layer w12: v1(800,3820) 775,3820 745,3790 745,3695 700,3650 670,3650 640,3620 640,3510 535,3405 535,2900 560,2875 785,2875 860,2800 v1(1085,2800)
  Bottom Layer w12: EE.5@797.4,3812.6 EE.5@797.4,3827.24 ; v1(1085,2800) 1100.01,2784.99 Pic32.27@1234.4,2784.99
WRITE: "Lcd 3,2\".6" Picaso-SGX.58 | length 1936.9
  Top Layer w12: v1@670,1800 v1(670.55,1800.55) 670.55,2168.5 ; v1@745.01,1802 1020,1800 1145,1675 1145,1295 1360,1080 v1(1360,920)
  Bottom Layer w12: v1@668.17,1801.83 v1@745,1801.83 ; Picaso-SGX.58@1337.8,1106.3 1337.8,982.2 1360,960 v1(1360,920)
  other v1: 745,1800
X+: "Lcd 3,2\".29" Picaso-SGX.2 R15.1 | length 2257.8
  Top Layer w12: v1(1105,1025) 1145,1025 1310,860 1395,860 1435,900 1435,1025 1470,1060 1685,1060 1740,1115 1740,1190 1680,1250 1680,1620 1510,1790 1510,2005 1576.06,2071.06 1576.06,2168.5
  Bottom Layer w12: R15.1@1080,1080 1060,1100 1060,1180 1084.72,1204.72 Picaso-SGX.2@1140.94,1204.72
X-: "Lcd 3,2\".27" Picaso-SGX.47 | length 1258.2
  Top Layer w12: 1497.32,2168.5 1497.32,2082.32 1440,2025 1440,1765 1625,1580 1625,1210 v1(1680,1155)
  Bottom Layer w12: Picaso-SGX.47@1593.7,1204.72 1655.28,1204.72 1680,1180 v1(1680,1155)
Y+: "Lcd 3,2\".28" Picaso-SGX.3 R16.1 | length 2438.1
  Top Layer w12: v1(995,1065) 1150,1065 1325,890 1380,890 1405,915 1405,1040 1460,1095 1675,1095 1715,1135 1715,1175 1650,1240 1650,1600 1470,1780 1470,2015 1536.69,2081.69 1536.69,2168.5
  Bottom Layer w12: R16.1@960,1030 960,1110 1074.41,1224.41 Picaso-SGX.3@1140.94,1224.41
Y-: "Lcd 3,2\".26" Picaso-SGX.48 | length 1211.8
  Top Layer w12: 1457.95,2168.5 1457.95,2082.95 1415,2040 1415,1745 1600,1560 1600,1440 v1(1600,1140)
  Bottom Layer w12: v1(1600,1140) 1600,1178.74 Picaso-SGX.48@1593.7,1185.04 Picaso-SGX.48@1634.96,1185.04
pads on no net: 386.1 386.8 ADXL345.0 HMC6352.0 HMC6352.1 HMC6352.2 HMC6352.3 HMC6352.4 HMC6352.6 HMC6352.8 HMC6352.9 HMC6352.11 HMC6352.12 HMC6352.13 HMC6352.15 HMC6352.16 HMC6352.17 HMC6352.18 HMC6352.19 HMC6352.20 HMC6352.21 HMC6352.24 Int.0 ITG-3200.0 ITG-3200.2 ITG-3200.3 ITG-3200.4 ITG-3200.5 ITG-3200.6 ITG-3200.7 ITG-3200.14 ITG-3200.15 ITG-3200.16 ITG-3200.17 ITG-3200.19 ITG-3200.21 ITG-3200.22 ITG-3200.NC Pic32.0 Picaso-SGX.0 Picaso-SGX.1 Picaso-SGX.31 Picaso-SGX.32 Picaso-SGX.36 Picaso-SGX.37 Picaso-SGX.42 Picaso-SGX.43 Picaso-SGX.44 Picaso-SGX.45 Picaso-SGX.49 Picaso-SGX.50 Picaso-SGX.51 Picaso-SGX.52 Picaso-SGX.53 Picaso-SGX.54 Picaso-SGX.55 Picaso-SGX.62 Picaso-SGX.63 Picaso-SGX.64 Sd.0 Sd.1 Sd.8

## Other copper
Top Layer:
  text "MG" at 340,80 h60

## Silkscreen, mask and mechanical layers (free items; w line width, h text height)
Top Overlay:
  circle w10: c1940,4060 r7.07
  lines w10: 75,4160 285,4370 ; 1275,4170 1295,4170 1295,4270 1275,4270 ; 1285,4170 1285,4270 ; 1510,200 1555,200 ; 2025,4375 2250,4150 ; 2035,75 2250,290 ; 2040,120 2040,240
  text "IGruppio V2" at 560,1845 h157.48
  text "By Michele Gruppioni" at 640,1690 h60
  text "2010" at 1155,1560 h60
  text "Michele" at 1400,140 h60
  text "7/2010" at 780,110 h60
  text "IGruppio V2" at 950,100 h100.8
  text "Gruppioni" at 1370,90 h60
Bottom Overlay:
  lines w10: 820,2600 860,2600 860,2640 ; 1955,1555 1995,1555 1995,1510
Mechanical 15:
  lines w10: 247.51,15 247.51,92.49 247.51,122.49 76.7,293.3 76.7,355 76.7,4370 770,4370 770,4285 1575,4285 1575,4375 2250,4375 2250,350 2250,75 1963.07,75 1790,75 1790,200 1570,200 1570,70 760,70 760,200 550,200 550,15 300,15 250,15

## Text inside footprints (layer, text, board x,y; h text height)
Carica: Bottom Overlay "1" at 2050,170 h60
LS1: Bottom Overlay "1" at 2150,610 h60 r270
Sd: Bottom Overlay "uSD" at 420,1120 h60 r270
StepUp: Bottom Overlay "1" at 295,265 h50 r270
usb: Bottom Overlay "NO PATTERN" at 120,3915 h19.68 r90
"VIN EXT": Top Overlay "1" at 2500,260 h60 r180